# Altium PCB ControlBoard.PcbDoc
Units mil, origin at the board's own origin, x right, y up, seen from the top; angles counter-clockwise.
Board outline 3007.03 x 1341.87 mil, 2 copper layers (Top Layer, Bottom Layer); 95 components, 123 nets, 343 pads, 25 vias.
Unrouted connection lines stored in the file: 1.
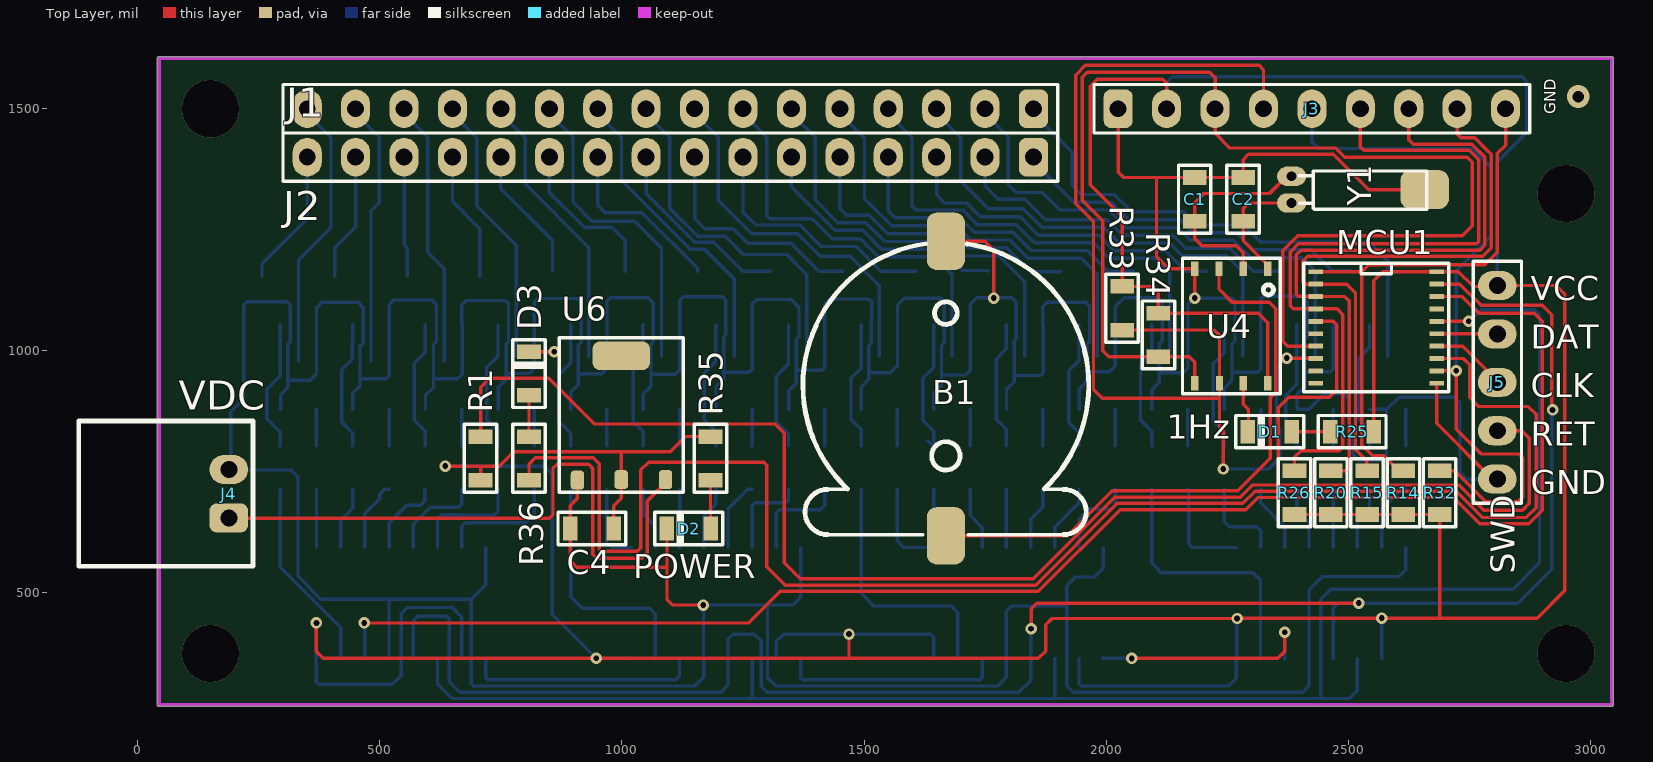
[diagram p0: Top Layer view]
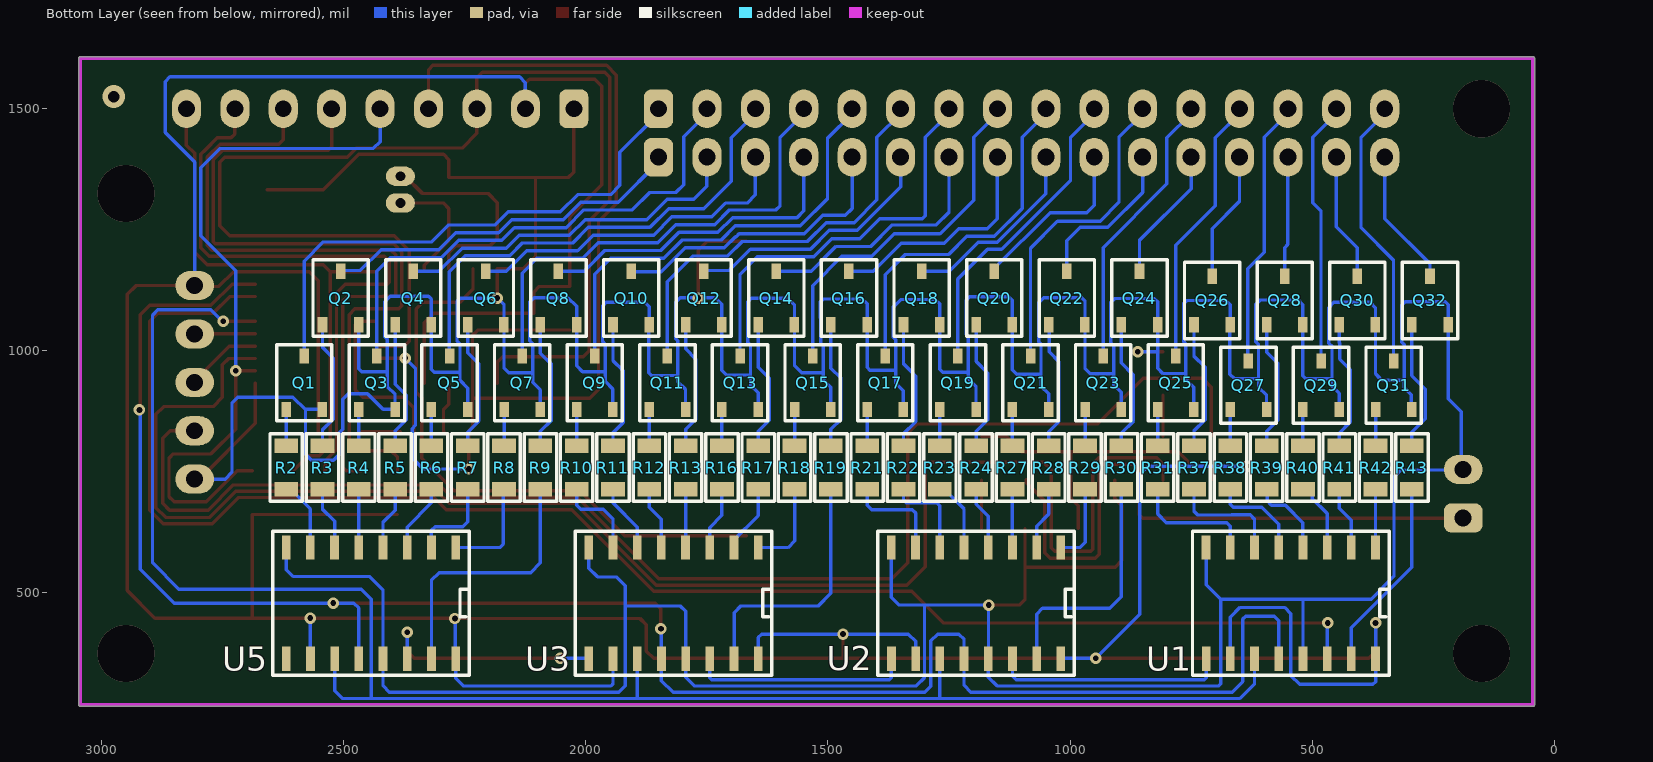
[diagram p1: Bottom Layer view, seen from below]
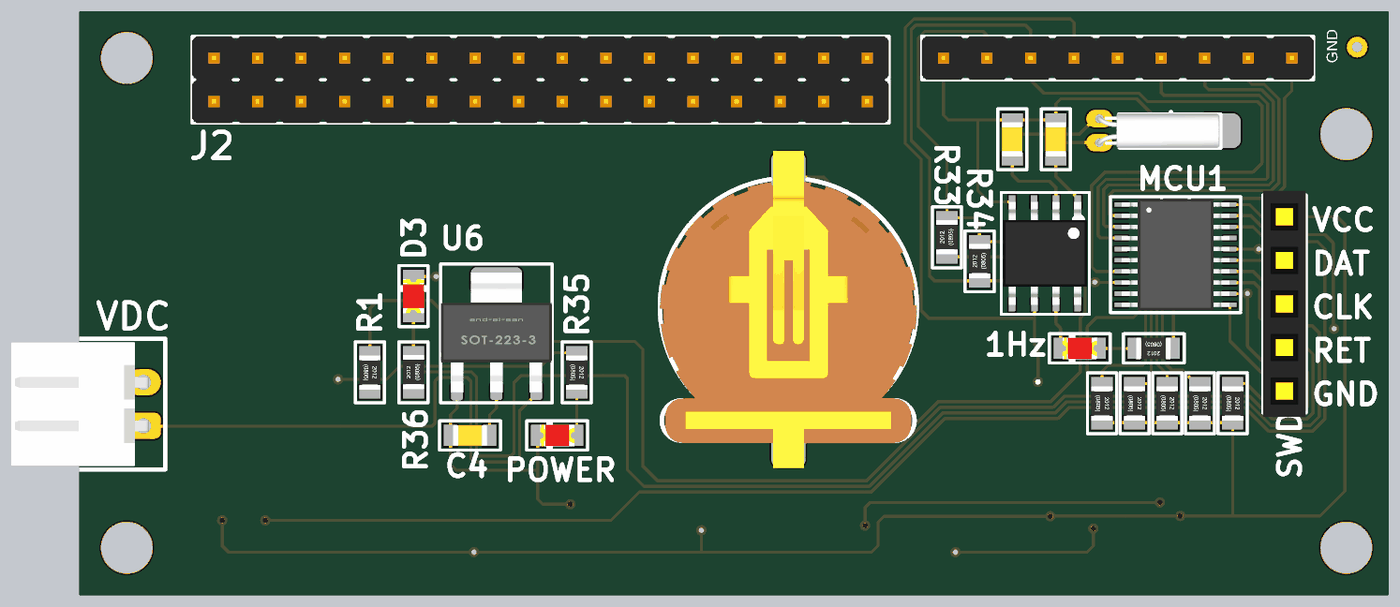
[diagram p2: 3D render of the assembled board from above, using the file's embedded part models]
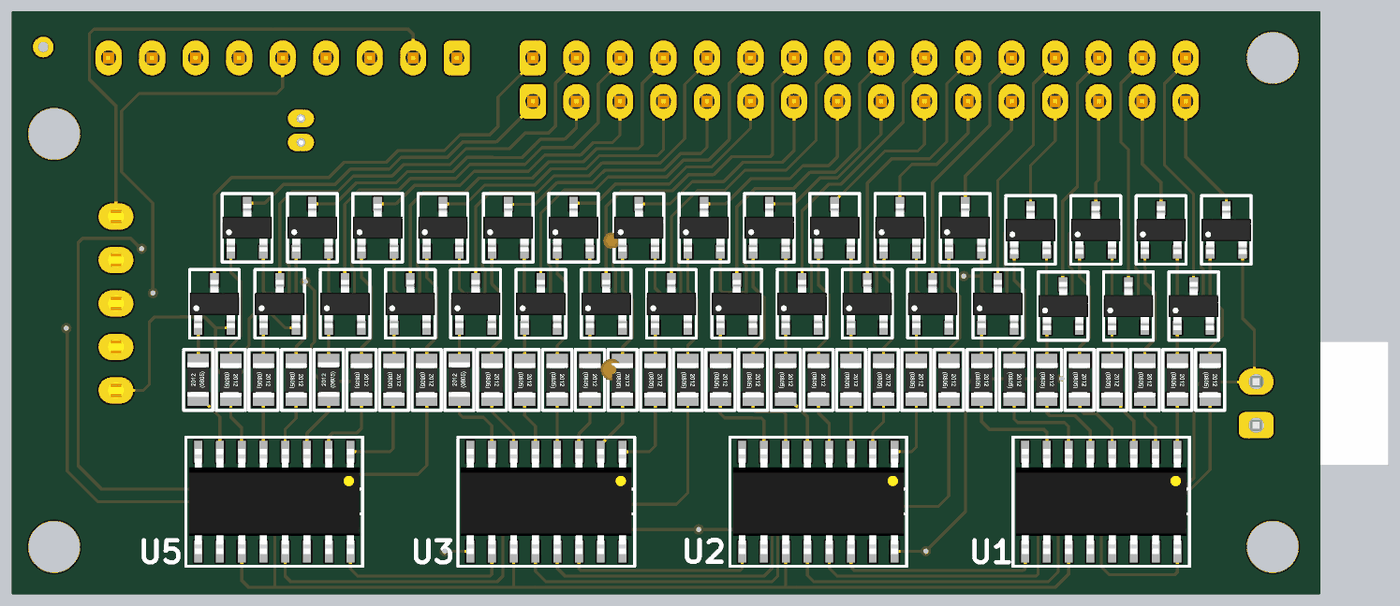
[diagram p3: 3D render of the assembled board from below, using the file's embedded part models]

## Layer stack, top to bottom
Top Solder: solder mask 0.4, Solder Resist, Dk 3.5
Top Layer: signal copper 1.4
Dielectric 1: dielectric 12.6, FR-4, Dk 4.8
Bottom Layer: signal copper 1.4
Bottom Solder: solder mask 0.4, Solder Resist, Dk 3.5

## Board outline
40.48,269.16 ccw(c44,269.16) 44,265.64 3044,265.64 ccw(c3044,269.16) 3047.51,269.16 3047.51,1604 ccw(c3044,1604) 3044,1607.51 44,1607.51 ccw(c44,1604) 40.48,1604

## Design rules (kind name [scope] priority, off if disabled: settings)
Clearance [All] p1: gap=5.91 ignorepadtopadclearanceinfootprint=FALSE
PolygonConnect [All] p1: connectstyle=Relief reliefconductorwidth=10 reliefentries=4 polygonreliefangle="90 Angle" airgapwidth=10
RoutingVias [All] p1: holewidth=11.81 width=23.62 viastyle="Through Hole" minholewidth=11.81 minwidth=23.62 maxholewidth=11.81 maxwidth=23.62
SolderMaskExpansion [All] p1: expansion=4 istentingtop=FALSE
Width [All] p1: maxlimit=15 minlimit=7 preferedwidth=10
30 further rules are at their usual default settings.

## Components (designator, comment, footprint, x,y, rotation, side; value= is the part's Value field where it differs from the comment)
B1 "Batery" CR1220 1669,929 r0 top
C1 "104" C0805 2183,1313 r90 top
C2 "104" C0805 2283,1313 r90 top
C4 "104" C0805 938,633 r0 top
D1 "1Hz" L0805RED 2338,833 r180 top
D2 "POWER" L0805RED 1138,633 r180 top
D3 "TEST" L0805RED 808,953 r90 top
J1 "HEADER-MALE-2.54MM" HEADER-MALE-16PINS-2.54MM 1100,1400 r180 top
J2 "HEADER-MALE-2.54MM" HEADER-MALE-16PINS-2.54MM 1100,1500 r180 top
J3 "HEADER-MALE-2.54MM" HEADER-MALE-09PINS-2.54MM 2375,1500 r0 top
J4 "VDC" "JST - XH - Thru (R) - 2Pin - 2.54mm" 188,705 r90 top
J5 "SWD" HEADER-FEMALE-05PINS-2.54MM 2808,935 r270 top
MCU1 "Mini58FDE" TSSOP20_0.65_4.4 2558,1048.16 r0 top
Q1 "2N3904" SOT23-3#1 2581.6,934.12 r180 bottom
Q2 "2N3904" SOT23-3#1 2506.6,1109.12 r180 bottom
Q3 "2N3904" SOT23-3#1 2431.6,934.12 r180 bottom
Q4 "2N3904" SOT23-3#1 2356.6,1109.12 r180 bottom
Q5 "2N3904" SOT23-3#1 2281.6,934.12 r180 bottom
Q6 "2N3904" SOT23-3#1 2206.6,1109.12 r180 bottom
Q7 "2N3904" SOT23-3#1 2131.6,934.12 r180 bottom
Q8 "2N3904" SOT23-3#1 2056.6,1109.12 r180 bottom
Q9 "2N3904" SOT23-3#1 1981.6,934.12 r180 bottom
Q10 "2N3904" SOT23-3#1 1906.6,1109.12 r180 bottom
Q11 "2N3904" SOT23-3#1 1831.6,934.12 r180 bottom
Q12 "2N3904" SOT23-3#1 1756.6,1109.12 r180 bottom
Q13 "2N3904" SOT23-3#1 1681.6,934.12 r180 bottom
Q14 "2N3904" SOT23-3#1 1606.6,1109.12 r180 bottom
Q15 "2N3904" SOT23-3#1 1531.6,934.12 r180 bottom
Q16 "2N3904" SOT23-3#1 1456.6,1109.12 r180 bottom
Q17 "2N3904" SOT23-3#1 1381.6,934.12 r180 bottom
Q18 "2N3904" SOT23-3#1 1306.6,1109.12 r180 bottom
Q19 "2N3904" SOT23-3#1 1231.6,934.12 r180 bottom
Q20 "2N3904" SOT23-3#1 1156.6,1109.12 r180 bottom
Q21 "2N3904" SOT23-3#1 1081.6,934.12 r180 bottom
Q22 "2N3904" SOT23-3#1 1006.6,1109.12 r180 bottom
Q23 "2N3904" SOT23-3#1 931.6,934.12 r180 bottom
Q24 "2N3904" SOT23-3#1 856.6,1109.12 r180 bottom
Q25 "2N3904" SOT23-3#1 781.6,934.12 r180 bottom
Q26 "2N3904" SOT23-3#2 706.6,1104 r180 bottom
Q27 "2N3904" SOT23-3#2 631.6,929 r180 bottom
Q28 "2N3904" SOT23-3#2 556.6,1104 r180 bottom
Q29 "2N3904" SOT23-3#2 481.6,929 r180 bottom
Q30 "2N3904" SOT23-3#2 406.6,1104 r180 bottom
Q31 "2N3904" SOT23-3#2 331.6,929 r180 bottom
Q32 "2N3904" SOT23-3#2 256.6,1104 r180 bottom
R1 "10k" R0805 708,778 r270 top
R2 "10k" R0805 2619,759 r90 bottom
R3 "10k" R0805 2544,759 r270 bottom
R4 "10k" R0805 2469,759 r270 bottom
R5 "10k" R0805 2394,759 r270 bottom
R6 "10k" R0805 2319,759 r90 bottom
R7 "10k" R0805 2244,759 r270 bottom
R8 "10k" R0805 2169,759 r270 bottom
R9 "10k" R0805 2094,759 r270 bottom
R10 "10k" R0805 2019,759 r90 bottom
R11 "10k" R0805 1944,759 r270 bottom
R12 "10k" R0805 1869,759 r270 bottom
R13 "10k" R0805 1794,759 r270 bottom
R14 "10k" R0805 2614,707 r270 top
R15 "10k" R0805 2539,707 r270 top
R16 "10k" R0805 1719,759 r270 bottom
R17 "10k" R0805 1644,759 r270 bottom
R18 "10k" R0805 1569,759 r270 bottom
R19 "10k" R0805 1494,759 r270 bottom
R20 "10k" R0805 2464,707 r270 top
R21 "10k" R0805 1419,759 r270 bottom
R22 "10k" R0805 1344,759 r270 bottom
R23 "10k" R0805 1269,759 r270 bottom
R24 "10k" R0805 1194,759 r270 bottom
R25 "10k" R0805 2508,833 r180 top
R26 "10k" R0805 2389,707 r270 top
R27 "10k" R0805 1119,759 r270 bottom
R28 "10k" R0805 1044,759 r270 bottom
R29 "10k" R0805 969,759 r270 bottom
R30 "10k" R0805 894,759 r270 bottom
R31 "10k" R0805 819,759 r270 bottom
R32 "10k" R0805 2689,707 r270 top
R33 "10k" R0805 2033,1088 r90 top
R34 "10k" R0805 2108,1033 r90 top
R35 "10k" R0805 1183,778 r270 top
R36 "10k" R0805 808,778 r90 top
R37 "10k" R0805 744,759 r270 bottom
R38 "10k" R0805 669,759 r270 bottom
R39 "10k" R0805 594,759 r270 bottom
R40 "10k" R0805 519,759 r270 bottom
R41 "10k" R0805 444,759 r270 bottom
R42 "10k" R0805 369,759 r270 bottom
R43 "10k" R0805 294,759 r270 bottom
U1 "74HC595D" SO16 544,479 r270 bottom
U2 "74HC595D" SO16 1194,479 r270 bottom
U3 "74HC595D" SO16 1819,479 r270 bottom
U4 "RealTime" SOIC08_1.27_6.0 2258.3,1051.27 r270 top
U5 "74HC595D" SO16 2444,479 r270 bottom
U6 "AMS1117" SOT223-3 998.55,869.81 r0 top
Y1 "32.768KHz" DT-26 2383,1333 r180 top

## Footprints (in the part's own frame and the unit in brackets; to place one, negate y for a bottom-side part, rotate by r counter-clockwise, add the part's x,y. Pads: shape width x height; smd on the part's side, far side on the other; paste and mask are expansions set on the pad)
C0805 [mil]
  rect 30x48.82 smd: 1(-45,0) 2(45,0)
  silkscreen extent -70,-33 70,33, body extent -39,-24 39,24, height 39
CR1220 [mm]
  rrect50% 2x3 smd: 1(0,-7.9) 2(0,7.55)
  silkscreen extent -7.5,-7.84 7.5,7.43, body extent -7.5,-9.43 7.5,9.07, height 4.04
DT-26 [mil]
  oval 60x40 hole 20: 1(0,27.56) 2(0,-27.56)
  rrect50% 100x80 smd: 3(-275,0)
  silkscreen extent -279,-38 -15,40, body extent -275,-39 6,39, height 79
HEADER-FEMALE-05PINS-2.54MM [mil]
  oval 60x80 hole 35: 1(-200,0) 2(-100,0) 3(0,0) 4(100,0) 5(200,0)
  silkscreen extent -250,-50 250,50, body extent -260,-49 260,49, height 197
HEADER-MALE-09PINS-2.54MM [mil]
  rrect50% 60x80 hole 35: 1(-350,0)
  oval 60x80 hole 35: 2(-250,0) 3(-150,0) 4(-50,0) 5(50,0) 6(150,0) 7(250,0) 8(350,0) 9(450,0)
  silkscreen extent -400,-50 500,50, body extent -400,-50 500,50, height 350
HEADER-MALE-16PINS-2.54MM [mil]
  rrect50% 60x80 hole 35: 1(-750,0)
  oval 60x80 hole 35: 2(-650,0) 3(-550,0) 4(-450,0) 5(-350,0) 6(-250,0) 7(-150,0) 8(-50,0) 9(50,0) 10(150,0) 11(250,0) 12(350,0) 13(450,0) 14(550,0) 15(650,0) 16(750,0)
  silkscreen extent -800,-50 800,50, body extent -800,-50 800,50, height 350
"JST - XH - Thru (R) - 2Pin - 2.54mm" [mil]
  rrect50% 60x80 hole 35: 1(-50,0)
  oval 60x80 hole 35: 2(50,0)
  silkscreen extent -150,-50 150,310, body extent -142,-13 142,304, height 230
L0805RED [mil]
  rect 30x48.82 smd: 1(-45,0) 2(45,0)
  silkscreen extent -70,-35 70,35, body extent -39,-25 39,25, height 43
R0805 [mil]
  rect 30x48.82 smd: 1(-45,0) 2(45,0)
  silkscreen extent -70,-33 70,33, body extent -39,-25 40,25, height 18
SO16 [mil]
  rect 50x18 smd: 1(-114.78,174.95) 2(-114.78,124.95) 3(-114.78,74.95) 4(-114.78,24.95) 5(-114.78,-25.05) 6(-114.78,-75.05) 7(-114.78,-125.05) 8(-114.78,-175.05) 9(114.78,-174.95) 10(114.78,-124.95) 11(114.78,-74.95) 12(114.78,-24.95) 13(114.78,25.05) 14(114.78,75.05) 15(114.78,125.05) 16(114.78,175.05)
  silkscreen extent -148,-203 149,203, body extent -121,-196 121,196, height 69
SOIC08_1.27_6.0 [mil]
  rect 30x15 smd: 1(-118.27,75.3) 2(-118.27,25.1) 3(-118.27,-25.1) 4(-118.27,-75.3) 5(118.27,-75.3) 6(118.27,-24.11) 7(118.27,25.1) 8(118.27,75.3)
  silkscreen extent -140,-101 140,101, body extent -118,-96 118,96, height 69
SOT23-3#1 [mm]
  rect 0.5x0.8 smd: 1(-0.95,-1.4) 2(0.95,-1.4) 3(0,1.4)
  silkscreen extent -1.45,-2 1.45,2, body extent -1.45,-1.4 1.45,1.4, height 1.3
SOT23-3#2 [mm]
  rect 0.5x0.8 smd: 1(-0.95,-1.27) 2(0.95,-1.27) 3(0,1.27)
  silkscreen extent -1.45,-2 1.45,2, body extent -1.45,-1.4 1.45,1.4, height 1.3
SOT223-3 [mm]
  rrect50% 0.7x1 smd: 1(-2.3,-3.475) 2(0,-3.45) 3(2.325,-3.45)
  rrect50% 3x1.5 smd: 4(0,3.048)
  silkscreen extent -3.25,-4.11 3.25,3.99, body extent -3.25,-3.5 3.25,3.5, height 1.7
TSSOP20_0.65_4.4 [mil]
  rect 30x10 smd: 1(-125,115.16) 2(-125,89.57) 3(-125,63.98) 4(-125,38.39) 5(-125,12.8) 6(-125,-12.8) 7(-125,-38.39) 8(-125,-63.98) 9(-125,-89.57) 10(-125,-115.16) 11(125,-115.16) 12(125,-89.57) 13(125,-63.98) 14(125,-38.39) 15(125,-12.8) 16(125,12.8) 17(125,38.39) 18(125,63.98) 19(125,89.57) 20(125,115.16)
  silkscreen extent -150,-133 150,133, body extent -124,-128 124,128, height 43

## Part data
C1 C2 C4: library part Capacitors(SMD)
D1 D2 D3: library part LED0805
J1 J2: library part HEADER-MALE-16PINS-2.54MM
J3: library part HEADER-MALE-09PINS-2.54MM
J4: library part "JST - XH - Thru (R) - 2Pin - 2.54mm"
J5: library part HEADER-FEMALE-05PINS-2.54MM
MCU1: library part Mcu-Mini58FDE, "Novoton 4Kb-RAM 32Kb-Flash"
Q1 Q2 Q3 Q4 Q5 Q6 Q7 Q8 Q9 Q10 Q11 Q12 Q13 Q14 Q15 Q16 Q17 Q18 Q19 Q20 Q21 Q22 Q23 Q24 Q25 Q26 Q27 Q28 Q29 Q30 Q31 Q32: library part "Transistor-2N3904 (SOT-23)"
R1 R2 R3 R4 R5 R6 R7 R8 R9 R10 R11 R12 R13 R14 R15 R16 R17 R18 R19 R20 R21 R22 R23 R24 R25 R26 R27 R28 R29 R30 R31 R32 R33 R34 R35 R36 R37 R38 R39 R40 R41 R42 R43: library part Resistors-SMD
U1 U2 U3 U5: library part Ic-74HC595D
U4: library part RealTime-DS1307
U6: library part Ic-AMS1117(SOT-223)
Y1: library part "Crystal 32.768KHz"

## Via types
v1: diameter 23.62, hole 11.81, Top Layer to Bottom Layer, tented both sides, 20 vias
v2: diameter 118.11, hole 118.11, Top Layer to Bottom Layer, 4 vias
v3: diameter 47.24, hole 23.62, Top Layer to Bottom Layer, 1 vias

## Nets (pads, with @x,y where several pads share a name; then routed paths per layer and width w, separated by ;. In a path a pad name is that pad's centre, name@x,y a point inside that pad or via, vN(x,y) a via of type N, cw(c..) or ccw(c..) an arc to the next point about the centre after c; other vN are vias at no path point)
BT1: J3.9 MCU1.1 R14.1 | length 1161
  Top Layer w7: MCU1.1 2527.91,1163.31 ; R14.1 2604.59,752 2573.59,783 2550.29,783 2527.91,805.38 2527.91,1163.31 ; J3.9 2825,1425 2808,1408 2808,1204 2781.72,1177.72 2542.31,1177.72 2527.91,1163.31
BT2: J3.8 MCU1.2 R15.1 | length 1272.6
  Top Layer w7: R15.1 2538.6,752.4 2538.6,773.4 2515,797 2515,1120 2497.28,1137.72 MCU1.2 2410.01,1137.72 2405.91,1141.83 2405.91,1185 2416.09,1195.19 2777.59,1195.19 2795.09,1212.69 2795.09,1405.69 2784.89,1415.89 2760.97,1439.81 2733,1439.81 2725,1447.81 J3.8
BT3: J3.7 MCU1.3 R20.1 | length 1396.8
  Top Layer w7: R20.1 2495,752 2502.09,759.09 2502.09,1102.91 2492.87,1112.13 MCU1.3 2419.43,1112.13 2418.57,1113 2397.1,1113 2393,1117.1 2393,1198.5 2402.6,1208.09 2772.25,1208.09 2782.19,1218.04 2782.19,1400.35 2755.63,1426.91 2634,1426.91 2625,1435.91 J3.7
BT4: J3.6 MCU1.4 R26.1 | length 1539.3
  Top Layer w7: R26.1 2389,780 2403,794 2481,794 2489,802 2489,1075 2477.46,1086.54 MCU1.4 2432.64,1086.91 2386.09,1086.91 2380.09,1092.91 2380.09,1203.84 2397.25,1221 2765.18,1221 2769.28,1225.1 2769.28,1395 2750.28,1414 2532,1414 2525,1421 J3.6
BT5: J3.5 MCU1.12 R32.1 | length 1514.9
  Top Layer w7: MCU1.12 v1@2723,958.59 ; R32.1 2720.05,752 2784.05,688 2849.9,688 2861,699.1 2861,778 2852,787 2774.25,787 2723,838.25 v1@2723,958.59 ; v1(2723,959) v1@2723,958.59
  Bottom Layer w7: J3.5 2425,1432 2439,1418 2754.9,1418 2795.09,1377.8 2795.09,1237.55 2723,1165.45 v1(2723,959)
GND: B1.2 C1.2 C2.2 C4.1 D2.2 D3.2 J3.1 J4.2 J5.5 MCU1.11 Q1.2 Q2.2 Q3.2 Q4.2 Q5.2 Q6.2 Q7.2 Q8.2 Q9.2 Q10.2 Q11.2 Q12.2 Q13.2 Q14.2 Q15.2 Q16.2 Q17.2 Q18.2 Q19.2 Q20.2 Q21.2 Q22.2 Q23.2 Q24.2 Q25.2 Q26.2 Q27.2 Q28.2 Q29.2 Q30.2 Q31.2 Q32.2 U1.8 U1.13 U2.8 U2.13 U3.8 U3.13 U4.4 U5.8 U5.13 U6.1 Y1.3 | length 15763.5
  Top Layer w7: D3.2 v1(860,998) ; U6.1 908,695 893,680 C4.1 893,567 907,553 1092,553 ; D2.2 1093,487 1105,475 v1(1168,475) ; B1.2 1749.76,1226.24 1768,1208 v1(1768,1109) ; J3.1 2025,1369 2036,1358 2104,1358 ; v1(2183,1109) U4.4 2129.46,1169.54 2104,1195 2104,1358 ; Y1.3 2542,1333 2469,1406 2294,1406 2283,1395 C2.2 C1.2 2104,1358 ; MCU1.11 2683,850 2798,735 J5.5
  Bottom Layer w7: J4.2@188,754 316,754 331,739 331,534 378,487 689,487 ; J4.2 192,759 192,874 219.2,901.2 Q32.2 219.2,1095.14 225.05,1101 308.14,1101 314.75,1094.39 314.75,1017.92 309.91,1013.08 309.91,924.35 295.3,909.75 295.3,880.1 Q31.2 ; 310,939 356,939 364,947 364,948 369.2,953.2 Q30.2 369.2,1089.2 380,1100 455.14,1100 465.69,1089.45 465.69,1015.79 459,1009.09 459,942 ; Q29.2 444,879.2 444,912 459,927 459,942 ; U1.13 518.95,486 ; Q27.2 594.2,908.2 610.85,924.85 610.85,1013.85 617,1020 617,1095 607,1105 529,1105 519.2,1095.2 Q28.2 519.2,948.2 513,942 459,942 ; 611,942 660,942 670,952 670,1053.2 Q26.2 669.2,1095.2 678,1104 758.69,1104 765.69,1097 765.69,1019.69 761,1015 761,1009.65 760.85,1009.5 760.85,953.15 ; U1.8 719.05,517.05 689,487 ; Q25.2 744.2,925.2 760.85,941.85 760.85,953.15 ; v1(860,998) 819,998 ; Q23.2 894.2,914.2 910,930 910,953 ; Q21.2 1044.2,911.2 1060,927 1060,952 ; v1(1168,475) 1168.48,474.52 1168.48,364.69 U2.13 1168.95,325.95 1150.87,307.87 693.1,307.87 689,311.97 689,487 ; v1@1168.98,474.02 1169.95,475 1300.55,475 ; Q19.2 1194.2,926.2 1209.91,941.91 1209.91,956 ; Q17.2 1344.2,917.2 1359.91,932.91 1359.91,960 ; U2.8 1369.05,491 1353.05,475 1300.55,475 ; Q15.2 1494.2,925.2 1510,941 1510,1011 1514.75,1015.75 1514.75,1067.06 1515.69,1068 1515.69,1101.14 1509.84,1107 1429,1107 1419.2,1097.2 Q16.2 1419.2,965.86 1413.34,960 1359.91,960 ; 1511,955 1554,955 1569.2,970.2 Q14.2 1569.2,1095.2 1583,1109 1658,1109 1666,1101 1666,1018 1660,1012 1660,929 1644.2,913.2 Q13.2 ; 1661,950 1709,950 1719.2,960.2 Q12.2 1719.2,1096.2 1733,1110 1805,1110 1814.75,1100.25 1814.75,1025.37 1810,1020.63 1810,936 1794.2,920.2 Q11.2 ; 1811,949 1864.14,949 1870,954.86 1870,1053.2 Q10.2 1869.2,1091.2 1878,1100 1958,1100 1965.69,1092.31 1965.69,1019.69 1960,1014 1960,937 1944.2,921.2 Q9.2 ; 1961,957 2007,957 2019.2,969.2 Q8.2 2019.2,1092.2 2037,1110 2106.69,1110 2115.69,1101 2115.69,1020.79 2109.91,1015 2109.91,956 ; U3.8 1994.05,551 1976.05,533 1937,533 1919,515 1919,473 ; Q7.2 2094.2,919.2 2109.91,934.91 2109.91,956 ; Q5.2 2244.2,923 2259.91,938.71 2259.91,956.19 ; Q2.2 2469,1053.8 2469,962.72 2463.14,956.86 2409.91,956.86 ; Q1.2 2579,879 2579,877.89 ; U5.8 2619.05,548.05 2605,534 2447,534 2418.95,505.95 U5.13 2418.95,307.92 2406,294.97 1932.03,294.97 1919,308 1919,473 ; J5.5 2745,735 2731,749 2731,892 2719,904 2661,904 2660.85,904.15 2605.26,904.15 2579,877.89 ; 760.85,953.15 808,953.15 819,964.15 819,998 ; 819,998 819,1101 826,1108 908,1108 915.69,1100.31 915.69,1017 910,1011.31 910,953 ; 910,953 958.2,953 969.2,964 Q22.2 969.2,1103.2 976,1110 1054,1110 1065,1099 1065,1019 1060,1014 1060,952 ; 1060,952 1110.2,952 1119.2,961 Q20.2 1119.2,1104.2 1127,1112 1207.69,1112 1214.75,1104.94 1214.75,1033.73 1209.91,1028.89 1209.91,956 ; 1209.91,956 1263,956 1269.2,962.2 Q18.2 1269.2,1097.2 1278,1106 1350,1106 1365.69,1090.31 1365.69,1028.69 1359.91,1022.91 1359.91,960 ; 1300.55,475 1300.55,325.36 1318.03,307.87 1775.87,307.87 1793.95,325.95 U3.13 1793.95,461.95 1805,473 1919,473 ; 2109.91,956 2110.91,955 2159,955 2169.2,965.2 Q6.2 2169.2,1096.2 2182,1109 v1(2183,1109) 2260,1109 2266.09,1102.91 2266.09,1020.19 2259.91,1014 2259.91,956.19 ; 2259.91,956.19 2313.34,956.19 2319.2,962.05 Q4.2 2319.2,1107.14 2325.05,1113 2404,1113 2415.69,1101.31 2415.69,1029.39 2409.91,1023.61 2409.91,956.86 ; 2409.91,956.86 2409.91,925.78 2394.2,910.07 Q3.2 2419,879 2451,911 2491,911 2502,900 2502,838 2510,830 2510,785.29 2521.29,774 2566.71,774 2579,786.29 2579,877.89
  other v3: 2975,1525
IN1: R2.1 U5.7 | length 146.4
  Bottom Layer w7: U5.7 2569.05,673.45 2609.59,714 R2.1
IN2: R3.2 U5.6 | length 130.6
  Bottom Layer w7: U5.6 2519.05,648.05 2544,673 R3.2
IN3: R4.2 U5.5 | length 120.2
  Bottom Layer w7: R4.2 R4.2 U5.5
IN4: R5.2 U5.4 | length 130.6
  Bottom Layer w7: R5.2 2394,671 2419.05,645.95 U5.4
IN5: R6.1 U5.3 | length 140.9
  Bottom Layer w7: R6.1 2319,686 2369,636 2369,593.83 U5.3
IN6: R7.2 U5.2 | length 184.7
  Bottom Layer w7: R7.2 2244,647 2254,637 2311,637 2319.05,628.95 U5.2
IN7: R8.2 U5.1 | length 214.9
  Bottom Layer w7: R8.2 2171,712 2171,601 2178.22,593.78 U5.1
IN8: R9.2 U5.15 | length 553.7
  Bottom Layer w7: R9.2 2094,562 2114,542 2303,542 2318.95,526.05 U5.15
IN9: R10.1 U3.7 | length 178.8
  Bottom Layer w7: U3.7 1944.05,653.05 1964,673 2011,673 2019,681 R10.1
IN10: R11.2 U3.6 | length 140.9
  Bottom Layer w7: U3.6 1894.05,636.05 1944,686 R11.2
IN11: R12.2 U3.5 | length 130.6
  Bottom Layer w7: U3.5 1844.05,652.05 1869,677 R12.2
IN12: R13.2 U3.4 | length 120.2
  Bottom Layer w7: R13.2 R13.2 U3.4
IN13: R16.2 U3.3 | length 130.6
  Bottom Layer w7: R16.2 1719,660 1744.05,634.95 U3.3
IN14: R17.2 U3.2 | length 140.9
  Bottom Layer w7: R17.2 1644,659.83 1694.05,609.78 U3.2
IN15: R18.2 U3.1 | length 188.1
  Bottom Layer w7: R18.2 1569,609 1568.14,608.14 1582.5,593.78 U3.1
IN16: R19.2 U3.15 | length 526.3
  Bottom Layer w7: R19.2 1494,499 1520,473 1680,473 1693.95,459.05 U3.15
IN17: R21.2 U2.7 | length 210.8
  Bottom Layer w7: U2.7 1319.05,665.05 1325.59,671.59 1344.11,671.59 1344.51,672 1410,672 1419,681 R21.2
IN18: R22.2 U2.6 | length 188.3
  Bottom Layer w7: U2.6 1269.05,680.14 1274.9,686 1338.14,686 1344,691.86 R22.2
IN19: R23.2 U2.5 | length 146.4
  Bottom Layer w7: U2.5 1219.05,673.45 1259.59,714 R23.2
IN20: R24.2 U2.4 | length 130.6
  Bottom Layer w7: U2.4 1169.05,658.05 1194,683 R24.2
IN21: R27.2 U2.3 | length 120.2
  Bottom Layer w7: R27.2 R27.2 U2.3
IN22: R28.2 U2.2 | length 130.6
  Bottom Layer w7: R28.2 1044,663 1069.05,637.95 U2.2
IN23: R29.2 U2.1 | length 163.7
  Bottom Layer w7: R29.2 969,605 980.22,593.78 U2.1
IN24: R30.2 U2.15 | length 503.7
  Bottom Layer w7: R30.2 894,492 918,468 1057,468 1068.95,456.05 U2.15
IN25: R31.2 U1.7 | length 255.6
  Bottom Layer w7: U1.7 669.05,638.05 676.09,645.09 801.09,645.09 819,663 R31.2
IN26: R37.2 U1.6 | length 235.4
  Bottom Layer w7: U1.6 619.05,652.14 628,661.09 665.91,661.09 666,661 736,661 744,669 R37.2
IN27: R38.2 U1.5 | length 196.3
  Bottom Layer w7: U1.5 569.05,642.05 604,677 663.14,677 669,682.86 R38.2
IN28: R39.2 U1.4 | length 168.3
  Bottom Layer w7: U1.4 519.05,645.05 555,681 584,681 593,690 593,713 R39.2
IN29: R40.2 U1.3 | length 146.4
  Bottom Layer w7: U1.3 469.05,664.05 499.59,694.59 499.59,704 509.59,714 R40.2
IN30: R41.2 U1.2 | length 130.6
  Bottom Layer w7: U1.2 419.05,650.05 444,675 R41.2
IN31: R42.2 U1.1 | length 120.2
  Bottom Layer w7: R42.2 R42.2 U1.1
IN32: R43.2 U1.15 | length 401.5
  Bottom Layer w7: R43.2 294,552.75 418.95,427.79 U1.15
NetB1_1: B1.1 U4.3 | length 1226.4
  Top Layer w7: B1.1 1919.98,617.98 2012.72,710.72 2271.96,710.72 2339.3,778.05 2339.3,902.9 2350.5,914.1 2350.5,1086.5 2337,1100 2260,1100 2233.2,1126.8 U4.3
NetC1_1: C1.1 U4.2 Y1.2 | length 442.2
  Top Layer w7: U4.2 2283.39,1202.61 2269,1217 2198,1217 2183,1232 C1.1 2183,1306 2202,1325 2337.44,1325 2373,1360.56 Y1.2
NetC2_1: C2.1 U4.1 Y1.1 | length 250.2
  Top Layer w7: U4.1 2333.59,1177.04 2283,1227.63 C2.1 2283,1294 2294.44,1305.44 Y1.1
NetD1_1: D1.1 R25.2 | length 80
  Top Layer w7: D1.1 R25.2
NetD1_2: D1.2 U4.7 | length 104.8
  Top Layer w7: U4.7 2283.39,889.61 2294,879 2294,834 D1.2
NetD2_1: D2.1 R35.2 | length 100
  Top Layer w7: D2.1 R35.2
NetD3_1: D3.1 R36.2 | length 85
  Top Layer w7: R36.2 D3.1
NetJ4_1: J4.1 U6.3 | length 1322
  Top Layer w7: J4.1@188,654 850,654 857.55,661.55 857.55,757.55 866,766 931,766 940,757 940,580 948,572 1041,572 1051.91,582.91 1051.91,689.9 1090.09,728.08 U6.3
NetJ5_2: J5.2 MCU1.15 | length 125.2
  Top Layer w7: MCU1.15 2693,1035.36 2693.36,1035 J5.2
NetJ5_3: J5.3 MCU1.14 | length 157.7
  Top Layer w7: MCU1.14 2736.23,1009.77 2808,938 J5.3
NetMCU1_13: MCU1.13 R36.1 | length 3296.7
  Top Layer w7: R36.1 808,765.9 821.01,778.91 941.09,778.91 952.91,767.09 952.91,590.1 957.01,586 1032,586 1039,593 1039,754 1055.19,770.19 1292.81,770.19 1299,764 1299,554 1336.91,516.09 1854.6,516.09 2023.41,684.91 2282.65,684.91 2307.84,710.09 2722.91,710.09 2777.09,655.91 2867.65,655.91 2888,676.25 2888,869 2872,885 2770,885 2751,904 2751,971 2737.82,984.18 MCU1.13
NetMCU1_16: MCU1.16 U1.11 U2.11 U3.11 U5.11 | length 3627.3
  Top Layer w7: MCU1.16 v1@2748.98,1060.98
  Bottom Layer w7: U1.11 618.95,312.05 648.94,282.06 1269,282.06 ; U2.11 1268.95,282.11 1269,282.06 ; 1893.95,282.16 U3.11 ; 2443,283 2443,487 2464,508 2841.09,508 2895,561.91 2895,1074 2884,1085 2774.74,1085 2750.74,1061 v1(2749,1061) ; U5.11 2518.95,297.95 2503.06,282.06 2443,282.06 1893.95,282.06 1269,282.06
NetMCU1_18: MCU1.18 U1.14 | length 3277.5
  Top Layer w7: v1(468,438) 1262,438 1327.19,503.19 1859.94,503.19 2028.75,672 2288,672 2313,697 2717.75,697 2771.75,643 2873,643 2900.91,670.91 2900.91,1061.09 2884,1078 2770.13,1078 2736,1112.13 MCU1.18
  Bottom Layer w7: v1(468,438) 468.48,437.52 468.48,364.69 U1.14
NetMCU1_19: MCU1.19 U1.12 U2.12 U3.12 U5.12 | length 3928.2
  Top Layer w7: v1(1845,426) 1845,467 1857,479 v1(2522,479) ; MCU1.19 2730.78,1137.72 2774.41,1094.09 2900.91,1094.09 2920,1075 2920,880.12 v1(2922.12,878)
  Bottom Layer w7: U1.12 568.95,442.95 578,452 637.14,452 643,446.14 643,317 665.03,294.97 1204.97,294.97 1218.95,308.95 U2.12 1218.95,403.95 1230,415 1273.64,415 1287.64,401 1287.64,307.32 1300,294.97 1819.97,294.97 1843.95,318.95 U3.12 1844.48,364.74 1844.48,425.48 v1(1845,426) ; U5.12 2468.95,468.95 2479,479 v1(2522,479) 2850,479 2920,549 2920,875.88 v1(2922.12,878)
NetQ1_1: Q1.1 R2.2 | length 75
  Bottom Layer w7: R2.2 Q1.1
NetQ2_1: Q2.1 R3.1 | length 268.2
  Bottom Layer w7: R3.1 2544,837 2522,859 2522,985 2544,1007 Q2.1
NetQ3_1: Q3.1 R4.1 | length 75
  Bottom Layer w7: R4.1 Q3.1
NetQ4_1: Q4.1 R5.1 | length 269.1
  Bottom Layer w7: R5.1 2394,835 2371,858 2371,908 2394,931 Q4.1
NetQ5_1: Q5.1 R6.2 | length 75
  Bottom Layer w7: R6.2 Q5.1
NetQ6_1: Q6.1 R7.1 | length 269.1
  Bottom Layer w7: R7.1 2244,832 2221,855 2221,973 2244,996 Q6.1
NetQ7_1: Q7.1 R8.1 | length 75
  Bottom Layer w7: R8.1 Q7.1
NetQ8_1: Q8.1 R9.1 | length 269.1
  Bottom Layer w7: R9.1 2094,834 2071,857 2071,972 2094,995 Q8.1
NetQ9_1: Q9.1 R10.2 | length 75
  Bottom Layer w7: R10.2 Q9.1
NetQ10_1: Q10.1 R11.1 | length 267.4
  Bottom Layer w7: R11.1 1944,831 1923,852 1923,959 1944,980 Q10.1
NetQ11_1: Q11.1 R12.1 | length 75
  Bottom Layer w7: R12.1 Q11.1
NetQ12_1: Q12.1 R13.1 | length 267.4
  Bottom Layer w7: R13.1 1794,838 1773,859 1773,983 1794,1004 Q12.1
NetQ13_1: Q13.1 R16.1 | length 75
  Bottom Layer w7: R16.1 Q13.1
NetQ14_1: Q14.1 R17.1 | length 285.2
  Bottom Layer w7: R17.1@1632,814 1642,804 R17.1 1644,834 1621,857 1621,943 1644,966 Q14.1
NetQ15_1: Q15.1 R18.1 | length 75
  Bottom Layer w7: R18.1 Q15.1
NetQ16_1: Q16.1 R19.1 | length 267.4
  Bottom Layer w7: R19.1 1494,838 1473,859 1473,943 1494,964 Q16.1
NetQ17_1: Q17.1 R21.1 | length 75
  Bottom Layer w7: R21.1 Q17.1
NetQ18_1: Q18.1 R22.1 | length 270.7
  Bottom Layer w7: R22.1 1344,829 1319,854 1319,948 1344,973 Q18.1
NetQ19_1: Q19.1 R23.1 | length 75
  Bottom Layer w7: R23.1 Q19.1
NetQ20_1: Q20.1 R24.1 | length 269.9
  Bottom Layer w7: R24.1 1194,834 1170,858 1170,954 1194,978 Q20.1
NetQ21_1: Q21.1 R27.1 | length 75
  Bottom Layer w7: R27.1 Q21.1
NetQ22_1: Q22.1 R28.1 | length 267.4
  Bottom Layer w7: R28.1 1044,833 1023,854 1023,978 1043,998 1043,1053 Q22.1
NetQ23_1: Q23.1 R29.1 | length 75
  Bottom Layer w7: R29.1 Q23.1
NetQ24_1: Q24.1 R30.1 | length 270.7
  Bottom Layer w7: R30.1 894,830 869,855 869,950 894,975 Q24.1
NetQ25_1: Q25.1 R31.1 | length 75
  Bottom Layer w7: R31.1 Q25.1
NetQ26_1: Q26.1 R37.1 | length 269.1
  Bottom Layer w7: R37.1 744,835 721,858 721,966 744,989 Q26.1
NetQ27_1: Q27.1 R38.1 | length 75
  Bottom Layer w7: R38.1 Q27.1
NetQ28_1: Q28.1 R39.1 | length 269.1
  Bottom Layer w7: R39.1 594,834 571,857 571,974 594,997 Q28.1
NetQ29_1: Q29.1 R40.1 | length 75
  Bottom Layer w7: R40.1 Q29.1
NetQ30_1: Q30.1 R41.1 | length 269.1
  Bottom Layer w7: R41.1 444,830 421,853 421,961 443.09,983.09 443.09,1015.68 444,1016.59 Q30.1
NetQ31_1: Q31.1 R42.1 | length 75
  Bottom Layer w7: R42.1 Q31.1
NetQ32_1: Q32.1 R43.1 | length 273.2
  Bottom Layer w7: R43.1 294,832 266,860 266,921 294,949 Q32.1
NetU1_9: U1.9 U2.14 | length 479.7
  Bottom Layer w7: U1.9 718.95,324.88 723.06,320.78 1110.78,320.78 1118.95,328.95 U2.14
NetU2_9: U2.9 U3.14 | length 457.1
  Bottom Layer w7: U2.9 1368.95,324.88 1373.06,320.78 1739.85,320.78 1743.95,324.88 U3.14
NetU3_9: U3.9 U5.14 | length 476.6
  Top Layer w7: v1(2052.67,364.76) 2354.76,364.76 2369,379 v1(2369,419)
  Bottom Layer w7: U3.9@1993.17,365 2052.43,365 v1(2052.67,364.76) ; U5.14 2368.95,418.95 v1(2369,419)
nRESET: J5.4 MCU1.5 R1.1 | length 3394.6
  Top Layer w7: R1.1 708,925 726,943 849,943 943,849 1138.75,849 1316,849 1335,830 1335,562.16 1368.16,529 1849.25,529 2018.06,697.81 2277.31,697.81 2302.5,723 2355.18,723 ; MCU1.5 2469.05,1060.95 2476.09,1053.91 2476.09,919.09 2461,904 2376.89,904 2355.18,882.29 2355.18,723 ; J5.4 2858.5,835 2873.91,819.59 2873.91,684.91 2860,671 2780.25,671 2728.25,723 2355.18,723
O1: J2.1 Q1.3 | length 1103.9
  Bottom Layer w7: J2.1 1850,1490 1930,1410 1930,1341.81 1949,1322.81 2017.19,1322.81 2053.09,1286.91 2160.09,1286.91 2187,1260 2283.49,1260 2318.59,1224.91 2542.09,1224.91 2581.6,1185.4 Q1.3
O2: J1.1 Q2.3 | length 760.1
  Bottom Layer w7: J1.1 1850,1390 1933.09,1306.91 2010.6,1306.91 2046.5,1271 2153.5,1271 2180.41,1244.09 2268.89,1244.09 2303.99,1209 2423,1209 2466,1166 2504.83,1166 Q2.3
O3: J2.2 Q3.3 | length 1059.7
  Bottom Layer w7: J2.2 1750,1490 1798,1442 1798,1343 1814,1327 1868,1327 1904,1291 2004.01,1291 2040.5,1254.51 2147.5,1254.51 2173.82,1228.19 2262.3,1228.19 2298.39,1192.1 2404.1,1192.1 2431.6,1164.61 Q3.3
O4: J1.2 Q4.3 | length 739.5
  Bottom Layer w7: J1.2 1750,1340 1777,1313 1832,1313 1874.13,1270.87 1942,1270.87 1942.13,1271 2001.52,1271 2033.91,1238.61 2137.89,1238.61 2164.21,1212.28 2255.72,1212.28 2303.76,1164.24 Q4.3
O5: J2.3 Q5.3 | length 1004.3
  Bottom Layer w7: J2.3 1650,1490 1700,1440 1700,1350.22 1756.48,1293.75 1828.76,1293.75 1867.54,1254.96 1995.06,1254.96 2027.32,1222.7 2131.3,1222.7 2157.62,1196.38 2249.13,1196.38 2282,1163.51 2282,989.64 Q5.3
O6: J1.3 Q6.3 | length 699.9
  Bottom Layer w7: J1.3 1650,1322 1666.69,1305.31 1711.69,1305.31 1740.38,1276.62 1822.38,1276.62 1859.94,1239.06 1984.94,1239.06 2017.2,1206.8 2122.2,1206.8 2164.76,1164.24 Q6.3
O7: J2.4 Q7.3 | length 981.9
  Bottom Layer w7: J2.4 1550,1490 1599,1441 1599,1300 1608.09,1290.91 1703.58,1290.91 1733.76,1260.72 1814.28,1260.72 1851.85,1223.15 1974.35,1223.15 2006.62,1190.89 2101.11,1190.89 2131.6,1160.4 Q7.3
O8: J1.4 Q8.3 | length 669.3
  Bottom Layer w7: J1.4 1550,1289 1564,1275 1696.99,1275 1727.18,1244.81 1807.7,1244.81 1845.26,1207.25 1960.75,1207.25 2003.76,1164.24 Q8.3
O9: J2.5 Q9.3 | length 921.1
  Bottom Layer w7: J2.5 1450,1490 1501,1439 1501,1314 1557,1258 1691.49,1258 1720.59,1228.91 1801.11,1228.91 1839.01,1191 1948.6,1191 1981.6,1158 Q9.3
O10: J1.5 Q10.3 | length 617.4
  Bottom Layer w7: J1.5 1450,1294 1464.07,1279.93 1511.06,1279.93 1549.27,1241.72 1683.78,1241.72 1689.49,1236 1691,1236 1714,1213 1794.52,1213 1844.52,1163 1905.36,1163 Q10.3
O11: J2.6 Q11.3 | length 864.3
  Bottom Layer w7: J2.6 1350,1490 1399,1441 1399,1311.99 1446.08,1264.91 1503.59,1264.91 1542.68,1225.81 1677.19,1225.81 1707,1196 1778,1196 1831.6,1142.4 Q11.3
O12: J1.6 Q12.3 | length 540.3
  Bottom Layer w7: J1.6 1350,1338.49 1439.49,1249 1497,1249 1536.09,1209.91 1660.09,1209.91 1704,1166 1754.83,1166 Q12.3
O13: J2.7 Q13.3 | length 843
  Bottom Layer w7: J2.7 1250,1490 1299,1441 1299,1279 1305.09,1272.91 1393.09,1272.91 1434.59,1231.41 1492.1,1231.41 1529.51,1194 1646,1194 1681.6,1158.4 Q13.3
O14: J1.7 Q14.3 | length 521
  Bottom Layer w7: J1.7 1250,1286 1276,1260 1367,1260 1411.5,1215.5 1483.5,1215.5 1534.76,1164.24 Q14.3
O15: J2.8 Q15.3 | length 760.5
  Bottom Layer w7: J2.8 1150,1490 1199,1441 1199,1311 1268.5,1241.5 1363.01,1241.5 1409.51,1195 1471.5,1195 1531.6,1134.9 Q15.3
O16: J1.8 Q16.3 | length 478.6
  Bottom Layer w7: J1.8 1150,1273 1171,1252 1230,1252 1260,1222 1349,1222 1406.76,1164.24 Q16.3
O17: J2.9 Q17.3 | length 733.6
  Bottom Layer w7: J2.9 1050,1490 1099,1441 1099,1294 1156.09,1236.91 1213.09,1236.91 1251,1199 1340,1199 1381.6,1157.4 Q17.3
O18: J1.9 Q18.3 | length 398.8
  Bottom Layer w7: J1.9 1050,1324 1150,1224 1190,1224 1249.76,1164.24 Q18.3
O19: J2.10 Q19.3 | length 644.4
  Bottom Layer w7: J2.10 950,1490 999,1441 999,1352 1141.5,1209.5 1170.5,1209.5 1231.6,1148.4 Q19.3
O20: J1.10 Q20.3 | length 365.7
  Bottom Layer w7: J1.10 950,1301 965.57,1285.43 1041.31,1285.43 1156.6,1170.14 Q20.3
O21: J2.11 Q21.3 | length 658.2
  Bottom Layer w7: J2.11 850,1490 899,1441 899,1307 938,1268 1026,1268 1081.6,1212.4 Q21.3
O22: J1.11 Q22.3 | length 334
  Bottom Layer w7: J1.11 850,1327 921.91,1255.09 978.91,1255.09 1006.6,1227.4 Q22.3
O23: J2.12 Q23.3 | length 586
  Bottom Layer w7: J2.12 750,1490 800,1440 800,1345 931.6,1213.4 Q23.3
O24: J1.12 Q24.3 | length 279.9
  Bottom Layer w7: J1.12 750,1335 856.6,1228.4 Q24.3
O25: J2.13 Q25.3 | length 565.3
  Bottom Layer w7: J2.13 650,1490 700,1440 700,1300 781.6,1218.4 Q25.3
O26: J1.13 Q26.3 | length 269.4
  Bottom Layer w7: J1.13 650,1309 706.6,1252.4 Q26.3
O27: J2.14 Q27.3 | length 556
  Bottom Layer w7: J2.14 550,1490 599,1441 599,1204 633,1170 633,980.4 Q27.3
O28: J1.14 Q28.3 | length 248.7
  Bottom Layer w7: J1.14 550,1219.6 556.6,1213 Q28.3
O29: J2.15 Q29.3 | length 548.5
  Bottom Layer w7: J2.15 450,1490 499,1441 499,1306 481.6,1288.6 Q29.3
O30: J1.15 Q30.3 | length 264
  Bottom Layer w7: Q30.3 406.6,1212.6 450,1256 J1.15
O31: J2.16 Q31.3 | length 569.2
  Bottom Layer w7: Q31.3 332,979.4 332,1187 399,1254 399,1441 350,1490 J2.16
O32: J1.16 Q32.3 | length 284.7
  Bottom Layer w7: Q32.3 256.6,1179.54 350,1272.95 J1.16
SCL: J3.4 MCU1.8 R33.1 U4.6 | length 2302.7
  Top Layer w7: R33.1 2223,1043 2234.18,1031.82 U4.6 2234.18,902 ; v1(2242,756) 2242,835.09 2234.18,842.91 2234.18,902 ; J3.4 2325,1581 2316.41,1589.59 1957.34,1589.59 1937,1569.25 1937,1304 1974,1267 1974,920 1992,902 2234.18,902 ; v1(2372.78,985) 2373.19,984.59 2432.59,984.59 MCU1.8
  Bottom Layer w7: v1(2242,756) 2336,756 2359,779 2359,839 2352,846 2352,964.22 v1(2372.78,985)
SDA: J3.3 MCU1.7 R34.1 U4.5 | length 2582.8
  Top Layer w7: U4.5 2183,977 2175.98,984.02 2172,988 R34.1 2005,988 1993,1000 1993,1269 1951,1311 1951,1565 1961.41,1575.41 2213.59,1575.41 2225,1564 2225,1449.5 2255.59,1418.91 2474.35,1418.91 2493.25,1400 2746,1400 2756.38,1389.62 2756.38,1258.38 2736,1238 2396,1238 2365,1207 2365,1020 2375.23,1009.77 MCU1.7
VCC: C4.2 J3.2 J5.1 MCU1.20 R1.2 R14.2 R15.2 R20.2 R25.1 R26.2 R32.2 R33.2 R34.2 R35.1 U1.10 U1.16 U2.10 U2.16 U3.10 U3.16 U4.8 U5.10 U5.16 U6.2 | length 10191.6
  Top Layer w7: v1(369,438) 369,379 383,365 v1(947,365) 1469,365 ; v1(635,762) 708,762 ; R1.2 708,762 ; C4.2 983,680 998.55,695.55 U6.2 998.55,791.81 ; R35.1 1131,823 1099.81,791.81 998.55,791.81 ; v1(1469,415) 1469,365 ; J3.2 2125,1552.5 2116.5,1561 1982,1561 1967.09,1546.09 1967.09,1342.91 2033,1277 R33.2 2096,1133 2108,1121 R34.2 2314,1078 2333.59,1058.41 U4.8 ; R26.2 R20.2 R15.2 R14.2 R32.2 2689,451 2692,448 ; R25.1 2553,1145 2571.32,1163.31 MCU1.20 2727.68,1163.31 2758,1133 J5.1@2808,1133 ; J5.1 2929,1135 2947,1117 2947,505 2890,448 2692,448 ; 708,762 746.41,762 776.22,791.81 998.55,791.81 ; 1469,365 1860,365 1875,380 1875,434 1888.23,447.23 v1(2270.54,447.23) 2270.54,447.46 2270,448 v1(2569,448) 2692,448
  Bottom Layer w7: U1.16 368.95,316.86 374.81,311 526,311 544,329 544,457 557,470 649,470 668.95,450.05 U1.10 ; U1.16 v1@368.98,437.98 ; v1(635,762) 839,762 856,745 856,456 v1(947,365) 1018.17,365 U2.16 ; U2.10 1318.95,399.95 1334,415 v1(1469,415) 1637,415 1643.95,408.05 U3.16 ; U3.10 1943.95,311.97 1948.06,307.87 2253,307.87 2268.95,323.83 U5.16 2269.75,365.01 2269.75,446.44 v1(2270.54,447.23) ; J3.2 2125,1554 2137,1566 2859,1566 2869,1556 2869,1451 2808,1390 J5.1 ; U5.10 v1@2568.98,447.98
pads on no net: MCU1.6 MCU1.9 MCU1.10 MCU1.17 U5.9 U6.4
copper on no net:
  other v2: 150,375 2950,375 2950,1325 150,1500

## Keep-outs
Keep-Out Layer:
  lines w7: 44,269.16 44,1604 3044,1604 3044,269.16 44,269.16

## Silkscreen, mask and mechanical layers (free items; w line width, h text height)
Top Overlay:
  text "GND" at 2936.8,1488.15 h40 r90
  text "VCC" at 2877.35,1104.01 h50
  text "DAT" at 2877.35,1004.01 h50
  text "CLK" at 2877.35,904.01 h50
  text "RET" at 2877.35,804.01 h50
  text "GND" at 2877.35,704.01 h50